# EAGLE board CAN_Ventil_Final1 (EAGLE 4.09)
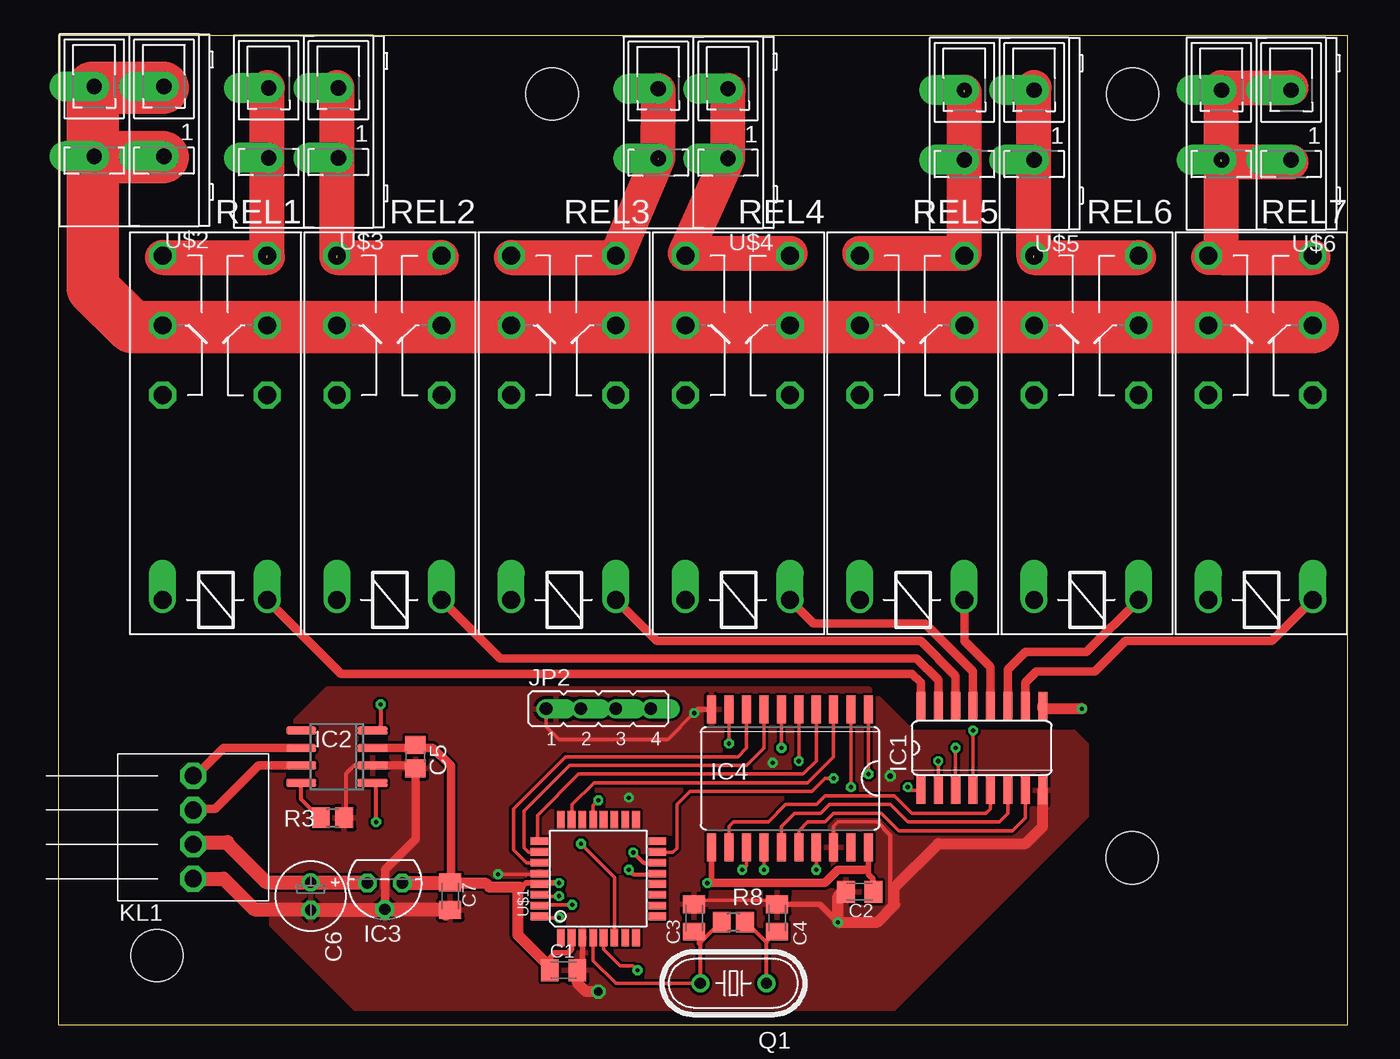
[diagram p0: board, top side]
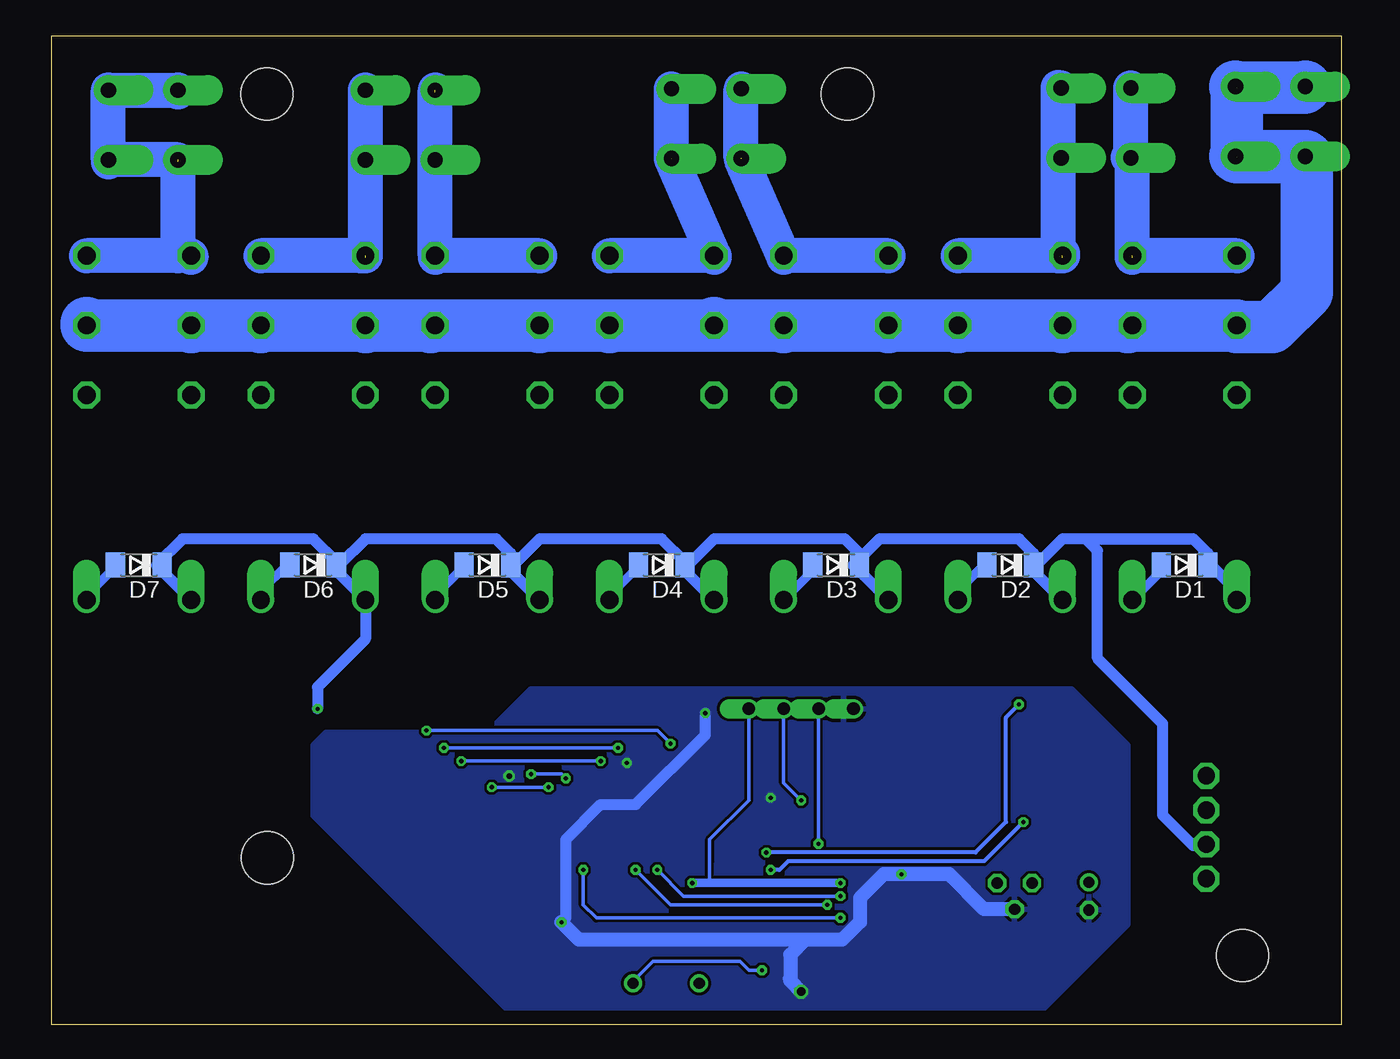
[diagram p1: board, bottom side, seen from below]

Size 93.96 x 72.06 mm. Coordinates in mm from the lower left corner, seen from the top.
Outline: 0,0 93.96,0 93.96,72.06 0,72.06 0,0
Copper layers used: Top, Bottom
Holes 3.81 mm at 78.25,12.15 78.3,67.82 35.99,67.82 7.2,5.02

## Footprints (pad centres in the part's own frame; a part is rotated, then mirrored left to right if it is on the bottom)
C0805K = smd 1.3 x 1.6: 1 -1,0; 2 1,0
C0805 = smd 1.3 x 1.5: 1 -0.85,0; 2 0.85,0
E2-5 = drill 0.813 pad 1.27 round: + -1.016,0 | drill 0.813 pad 1.27 octagon: - 1.016,0
SOD80C = smd 1.4 x 1.8: A 1.7,0; C -1.7,0
SO16 = smd 0.66 x 2.032: 1 -4.445,-3.073; 2 -3.175,-3.073; 3 -1.905,-3.073; 4 -0.635,-3.073; 5 0.635,-3.073; 6 1.905,-3.073; 7 3.175,-3.073; 8 4.445,-3.073; 9 4.445,3.073; 10 3.175,3.073; 11 1.905,3.073; 12 0.635,3.073; 13 -0.635,3.073; 14 -1.905,3.073; 15 -3.175,3.073; 16 -4.445,3.073
SO8 = smd 0.6 x 2.2: 1 -1.905,-2.6; 2 -0.635,-2.6; 3 0.635,-2.6; 4 1.905,-2.6; 5 1.905,2.6; 6 0.635,2.6; 7 -0.635,2.6; 8 -1.905,2.6
TO92 = drill 0.813 octagon: 1 -1.27,0; 2 0,1.905; 3 1.27,0
SO20W = smd 0.66 x 2.032: 1 -5.715,-5.029; 2 -4.445,-5.029; 3 -3.175,-5.029; 4 -1.905,-5.029; 5 -0.635,-5.029; 6 0.635,-5.029; 7 1.905,-5.029; 8 3.175,-5.029; 9 4.445,-5.029; 10 5.715,-5.029; 11 5.715,5.029; 12 4.445,5.029; 13 3.175,5.029; 14 1.905,5.029; 15 0.635,5.029; 16 -0.635,5.029; 17 -1.905,5.029; 18 -3.175,5.029; 19 -4.445,5.029; 20 -5.715,5.029
JP4 = drill 0.914 offset: 1 -3.81,0; 2 -1.27,0; 3 1.27,0; 4 3.81,0
AST021-04 = drill 1.27 octagon: P$1 0,0; P$2 0,2.5; P$3 0,5; P$4 0,7.5
HC49U-V = drill 0.813 round: 1 -2.413,0; 2 2.413,0
R0805 = smd 1.3 x 1.5: 1 -0.85,0; 2 0.85,0
FIN41 = drill 1.3 offset: 1 -10.16,3.81; 2 -10.16,-3.81 | drill 1.3 octagon: O1 4.763,-3.81; O2 4.763,3.81; P1 9.842,-3.81; P2 9.842,3.81; S1 14.922,-3.81; S2 14.922,3.81
LQFP32 = smd 1.27 x 0.559: 1 -4.293,2.743; 2 -4.293,1.956; 3 -4.293,1.168; 4 -4.293,0.381; 5 -4.293,-0.381; 6 -4.293,-1.168; 7 -4.293,-1.956; 8 -4.293,-2.743; 17 4.293,-2.743; 18 4.293,-1.956; 19 4.293,-1.168; 20 4.293,-0.381; 21 4.293,0.381; 22 4.293,1.168; 23 4.293,1.956; 24 4.293,2.743 | smd 0.559 x 1.27: 9 -2.743,-4.293; 10 -1.956,-4.293; 11 -1.168,-4.293; 12 -0.381,-4.293; 13 0.381,-4.293; 14 1.168,-4.293; 15 1.956,-4.293; 16 2.743,-4.293; 25 2.743,4.293; 26 1.956,4.293; 27 1.168,4.293; 28 0.381,4.293; 29 -0.381,4.293; 30 -1.168,4.293; 31 -1.956,4.293; 32 -2.743,4.293
W236-2 = drill 1.118 pad 2.184 offset: 1 0,0; 2 0,5.08; 3 5.08,0; 4 5.08,5.08

## Placement (x,y rotation side)
C1  100nF  [C0805K]  36.82,3.96 0 top
C2  100nF  [C0805K]  58.41,9.68 180 top
C3  10pF  [C0805K]  46.35,7.77 270 top
C4  10pF  [C0805K]  52.38,7.77 270 top
C5  100nF  [C0805]  26.03,19.52 270 top
C6  47µF  [E2-5]  18.41,9.36 270 top
C7  100nF  [C0805K]  28.57,9.36 270 top
D1  1N4148  [SOD80C]  11.42,33.49 180 bottom
D2  1N4148  [SOD80C]  24.12,33.49 180 bottom
D3  1N4148  [SOD80C]  36.82,33.49 180 bottom
D4  1N4148  [SOD80C]  49.52,33.49 180 bottom
D5  1N4148  [SOD80C]  62.22,33.49 180 bottom
D6  1N4148  [SOD80C]  74.93,33.49 180 bottom
D7  1N4148  [SOD80C]  87.62,33.49 180 bottom
IC1  ULN2003AD  [SO16]  67.31,20.16 0 top
IC2  PCA82C250T  [SO8]  20.32,19.52 90 top
IC3  7805L  [TO92]  23.81,10.31 180 top
IC4  74HCT373DW  [SO20W]  53.34,17.93 180 top
JP2  [JP4]  39.36,23.01 0 top
KL1  AST021-04  [AST021-04]  9.84,10.63 0 top
Q1  4.00000  [HC49U-V]  49.21,3.01 180 top
R3  2k7  [R0805]  20,15.07 0 top
R8  1M  [R0805]  49.21,7.46 180 top
REL1  FIN41.61  [FIN41]  11.42,41.11 90 top
REL2  FIN41.61  [FIN41]  24.12,41.11 90 top
REL3  FIN41.61  [FIN41]  36.82,41.11 90 top
REL4  FIN41.61  [FIN41]  49.52,41.11 90 top
REL5  FIN41.61  [FIN41]  62.22,41.11 90 top
REL6  FIN41.61  [FIN41]  74.93,41.11 90 top
REL7  FIN41.61  [FIN41]  87.62,41.11 90 top
U$1  MC9S08DZ16CLC  [LQFP32]  39.36,10.63 90 top
U$2  W236-2  [W236-2]  7.71,68.36 180 top
U$3  W236-2  [W236-2]  20.42,68.25 180 top
U$4  W236-2  [W236-2]  48.81,68.2 180 top
U$5  W236-2  [W236-2]  71.12,68.1 180 top
U$6  W236-2  [W236-2]  89.85,68.1 180 top

## Library data of the parts
C1-C7 R3 R8 = rcl
D1-D7 = diode
IC1 = uln-udn
IC2 = micro-philips
IC3 = linear
IC4 = 74xx-eu
JP2 = jumper
KL1 = con-ria
Q1 = crystal
REL1-REL7 = relay
U$1 = MC9S08DZ16CLC
U$2-U$6 = con-wago-508

## Nets
230V: REL1.P1 REL1.P2 REL2.P1 REL2.P2 REL3.P1 REL3.P2 REL4.P1 REL4.P2 REL5.P1 REL5.P2 REL6.P1 REL6.P2 REL7.P1 REL7.P2 U$2.1 U$2.2 U$2.3 U$2.4
+5V: C1.1 C2.1 C5.1 C7.1 IC2.3 IC3.1 IC4.11 IC4.20 JP2.4 U$1.2 U$1.29
+12V: C6.+ D1.C D2.C D3.C D4.C D5.C D6.C D7.C IC1.9 IC3.3 KL1.P$2 REL1.1 REL2.1 REL3.1 REL4.1 REL5.1 REL6.1 REL7.1
BKGD: JP2.3 U$1.21
CANH: IC2.7 KL1.P$3
CANL: IC2.6 KL1.P$4
CH1: REL1.S1 REL1.S2 U$3.3 U$3.4
CH2: REL2.S1 REL2.S2 U$3.1 U$3.2
CH3: REL3.S1 REL3.S2 U$4.3 U$4.4
CH4: REL4.S1 REL4.S2 U$4.1 U$4.2
CH5: REL5.S1 REL5.S2 U$5.3 U$5.4
CH6: REL6.S1 REL6.S2 U$5.1 U$5.2
CH7: REL7.S1 REL7.S2 U$6.1 U$6.2 U$6.3 U$6.4
GND: C1.2 C2.2 C3.1 C4.1 C5.2 C6.- C7.2 IC1.8 IC2.2 IC3.2 IC4.10 IC4.18 JP2.1 KL1.P$1 R3.2 U$1.3 U$1.28
N$1: IC2.1 U$1.13
N$2: IC2.4 U$1.14
N$3: IC2.8 R3.1
N$5: D3.A IC1.14 REL3.2
N$6: D1.A IC1.16 REL1.2
N$8: D2.A IC1.15 REL2.2
N$9: C4.2 Q1.1 R8.1 U$1.5
N$10: C3.2 Q1.2 R8.2 U$1.4
N$11: IC1.1 IC4.2
N$12: IC1.2 IC4.5
N$13: IC4.17 U$1.32
N$14: IC4.14 U$1.31
N$15: IC4.13 U$1.30
N$17: IC4.8 U$1.27
N$19: IC4.7 U$1.26
N$24: IC4.4 U$1.25
N$28: IC4.3 U$1.23
N$29: IC1.3 IC4.6
N$30: IC1.4 IC4.9
N$31: IC1.5 IC4.12
N$32: IC1.6 IC4.15
N$33: IC1.7 IC4.16
N$34: D4.A IC1.13 REL4.2
N$35: D5.A IC1.12 REL5.2
N$36: D6.A IC1.11 REL6.2
N$37: D7.A IC1.10 REL7.2
OE: IC4.1 U$1.15
RESET: JP2.2 U$1.6

## Tracks (layer width: path | path; a pad name or v marks a point on that pad's centre or on a via)
230V  (2 unrouted)
  Top 3.81: 7.62,68.28 2.54,68.28 2.54,53.68 5.39,50.82 91.44,50.82 | 2.54,63.2 7.62,63.2
  Bottom 3.81: U$2.2 7.62,63.37 7.62,68.26 U$2.1 7.63,68.28 2.71,68.28 U$2.3 | U$2.2 7.63,63.2 7.62,63.2 | 7.62,63.2 2.54,63.2 2.54,53.36 5.08,50.82 7.62,50.82 REL1.P2 REL1.P1 | 7.62,63.2 7.69,63.28 U$2.2 | U$2.4 7.54,63.28 7.62,63.2 | REL1.P1 15.42,50.95 15.55,50.82 | REL1.P1 20.18,50.95 20.32,50.82 REL2.P2 27.8,50.95 27.94,50.82 REL2.P1 32.88,50.95 33.02,50.82 REL3.P2 40.5,50.95 40.63,50.82 REL3.P1 45.53,50.95 45.71,51.14 REL4.P2 53.2,50.95 53.34,50.82 REL4.P1 58.28,50.95 58.41,50.82 REL5.P2 REL5.P1 | REL5.P1 66.22,50.95 66.35,50.82 | REL5.P1 70.98,50.95 71.12,50.82 REL6.P2 78.6,50.95 78.73,50.82 REL6.P1 83.68,50.95 83.81,50.82 REL7.P2 91.25,50.95 91.44,51.14 REL7.P1
+5V  (via drill 0.3)
  Top 0.254: 34.92,10.31 34.98,10.25 U$1.29 | 59.05,11.58 IC4.20
  Top 0.305: 26.03,20.16 25.39,20.16 | C5.1 26.03,20.47 25.71,20.47
  Top 0.406: IC4.11 47.62,10.63 v47.3,10.31 | v36.51,10.31 34.92,10.31 34.1,10.31 33.65,9.86 33.65,10.02 | IC4.20 59.05,10.95 59.37,10.63 59.37,9.68 C2.1 | 58.73,11.27 59.05,11.58 | U$1.2 37.41,5.5 37.14,5.23 36.19,5.23 35.87,4.92 35.87,3.96 C1.1
  Top 0.61: 58.73,11.27 56.83,11.27 55.88,10.31 v47.3,10.31 | C7.1 28.62,10.36 28.62,18.84 27.3,20.16 26.03,20.16 | C5.1 25.82,20.37 25.71,20.47 25.39,20.16 IC2.3
  Top 0.813: 28.57,10.31 31.14,10.31 31.43,10.02 33.65,10.02 33.49,9.86 33.49,6.53 35.87,4.15 35.87,3.96
  Top 1.016: C7.1 28.57,10.31 IC3.1
  Bottom 0.254: JP2.4 43.17,16.35 46.03,13.49 | 46.03,13.49 46.03,11.9 | 46.03,10.31 46.03,13.49
  Bottom 0.61: v36.51,10.31 46.03,10.31 v47.3,10.31
+12V  (via drill 0.3)
  Top 0.813: IC1.9 71.75,23.01 v74.61,23.01
  Top 1.016: IC3.3 22.47,10.38 C6.+ 15.17,10.38 12.33,13.21 12.33,13.28 9.99,13.28 KL1.P$2
  Bottom 0.813: REL1.1 7.62,31.59 9.52,33.49 D1.C 9.72,34.33 10.79,35.4 | D2.C 22.22,33.49 20.32,35.4 10.79,35.4 | D2.C 22.43,34.33 23.49,35.4 33.65,35.4 35.55,33.49 D3.C | D3.C 35.12,34.33 36.19,35.4 45.71,35.4 47.62,33.49 D4.C | D4.C 47.82,33.7 49.52,35.4 58.41,35.4 60.32,33.49 D5.C | D5.C 60.52,34.33 61.59,35.4 71.12,35.4 73.02,33.49 D6.C | D6.C 73.23,33.7 74.93,35.4 84.45,35.4 86.36,33.49 D7.C 85.93,33.06 REL7.1 | D6.C 73.23,33.06 REL6.1 71.12,30.5 | D5.C 60.52,33.06 REL5.1 | D4.C 47.82,33.06 REL4.1 | D3.C 35.12,33.06 REL3.1 | D2.C 22.43,33.06 REL2.1 | v74.61,23.01 74.61,24.6 71.12,28.09 71.12,30.5 | 9.84,13.2 KL1.P$2 9.84,13.04 10.79,13.04 13.01,15.26 13.01,21.93 17.78,26.69 17.78,34.54 18.61,35.38 10.81,35.38 10.79,35.4 | 71.12,30.5 71.12,30.82
BKGD  (via drill 0.3)
  Top 0.254: U$1.21 38.98,15.96 v39.36,16.35
  Bottom 0.254: v39.36,16.35 40.63,17.62 JP2.3
CANH
  Top 0.305: KL1.P$3 9.84,15.71
  Top 0.61: IC2.7 14.6,18.89 11.42,15.71 9.84,15.71
CANL
  Top 0.305: KL1.P$4 10.03,18.13
  Top 0.61: IC2.6 12.06,20.16 10.03,18.13
CH1  (1 unrouted)
  Top 2.54: 7.62,55.9 15.23,55.9 15.23,68.28
  Bottom 2.54: REL1.S2 15.1,56.03 15.23,55.9 REL1.S1 15.23,63.2 15.27,63.17 U$3.4 15.52,63.17 15.55,63.2 15.34,63.41 U$3.3
CH2  (1 unrouted)
  Top 2.54: 27.94,55.9 20.32,55.9 20.32,68.28
  Bottom 2.54: REL2.S2 REL2.S1 | REL2.S2 20.32,56.22 | 20.63,63.17 20.63,63.2 | REL2.S2 20.63,56.03 20.63,63.17 | 20.63,68.25 20.63,68.28 | 20.63,68.25 U$3.1 | 20.63,63.17 U$3.2 | 20.63,63.17 20.63,68.25
CH3  (1 unrouted)
  Top 2.54: 33.02,55.9 40.63,55.9 43.7,63.12 43.73,68.06
  Bottom 2.54: REL3.S2 REL3.S1 | REL3.S1 40.63,55.9 | U$4.4 43.73,63.3 | REL3.S1 U$4.4 | U$4.4 U$4.3
CH4  (1 unrouted)
  Top 2.54: 53.34,56.22 45.71,56.22 48.79,63.12 48.81,68.06
  Bottom 2.54: REL4.S2 REL4.S1 | REL4.S2 45.71,55.9 | REL4.S2 U$4.2 U$4.1
CH5  (1 unrouted)
  Top 2.54: 58.41,56.22 66.04,56.22 66.04,67.96
  Bottom 2.54: REL5.S2 REL5.S1 | REL5.S1 66.04,55.9 | REL5.S1 U$5.4 U$5.3
CH6  (1 unrouted)
  Top 2.54: 78.73,55.9 71.12,55.9 71.12,68.28
  Bottom 2.54: 71.43,56.03 REL6.S2 U$5.2 U$5.1 | 71.43,56.03 REL6.S1 | 71.43,56.03 71.43,56.22
CH7  (1 unrouted)
  Top 2.54: 84.77,55.9 91.44,55.9 | 84.77,55.9 83.81,55.9 | 84.77,55.9 84.77,62.88 | 84.77,62.88 84.77,68.28 89.85,68.28 | 84.77,62.88 89.85,62.88
  Bottom 2.54: REL7.S2 REL7.S1 | REL7.S2 83.81,55.9 | REL7.S2 84.77,56.03 U$6.4 U$6.2 | U$6.2 89.85,62.88 | U$6.2 U$6.1 U$6.3 84.77,67.96
GND  (via drill 0.3, 0.41, 0.61)
  Top 0.254: 59.68,14.76 56.83,14.76 56.51,14.44 IC4.18 56.51,12.85 | JP2.1 35.55,21.74 36.51,20.79 44.45,20.79 v46.35,22.7 | U$1.28 35.07,10.95 v32.06,10.95 | C4.1 52.38,9.04 46.62,9.04 C3.1
  Top 0.305: IC2.2 21.59,18.89 20.95,18.25 20.95,15.08 R3.2 | 59.68,14.76 60.64,13.81 60.64,8.41 59.68,7.46
  Top 0.406: IC4.10 46.62,22.96 v46.35,22.7 | C1.2 37.78,3.96 38.2,4.38 U$1.3 | C4.1 55.51,8.77 v56.83,7.46
  Top 0.61: 37.82,3.06 C1.2 | C7.2 28.57,8.41 | IC3.2 23.81,11.27 26.03,13.49 26.03,18.57 | 26.03,18.57 C5.2 | IC2.2 25.71,18.89 26.03,18.57
  Top 0.813: 57.46,9.68 C2.2 57.14,9.68 56.83,9.36 v56.83,7.46 59.68,7.46 60.95,8.73 60.95,10 64.13,13.17 70.48,13.17 71.75,14.44 IC1.8 | 37.82,3.06 38.48,2.4 v39.36,2.4
  Top 1.016: KL1.P$1 12.06,10.63 14.28,8.41 18.41,8.41 C6.- 23.74,8.34 IC3.2 27.94,8.41 28.25,8.09 28.52,8.36 C7.2
  Bottom 0.813: v46.35,22.7 46.35,21.11 51.43,16.03 53.97,16.03 56.51,13.49 56.51,7.77 v56.83,7.46 | v39.36,2.4 40.32,3.35
  Bottom 1.016: v56.83,7.46 55.56,6.19 36.37,6.19 | IC3.2 26.03,8.41 28.57,10.95 v32.06,10.95 33.31,10.95 33.33,10.97 35.08,9.23 35.08,7.48 36.37,6.19 | 36.37,6.19 39.07,6.19 40.16,5.1 40.16,3.19 v39.36,2.4
  other vias: 52.06,19.07 60.64,18.12 41.59,16.53
  pour Bottom: 59.05,24.47 62.22,21.29 73.97,21.29 74.93,20.34 74.93,15.26 59.68,0.02 22.86,0.02 15.55,7.32 15.55,20.34 19.68,24.47
  pour Top: 59.05,24.47 62.22,21.29 73.97,21.29 74.93,20.34 74.93,15.26 59.68,0.02 22.86,0.02 15.55,7.32 15.55,20.34 19.68,24.47
N$1  (via drill 0.3)
  Top 0.305: IC2.1 23.17,17.36 v23.17,14.76 | 43.72,10.95 43.81,10.95 | 43.72,10.95 U$1.13 | v41.59,11.27 41.9,10.95 43.72,10.95
  Bottom 0.305: v41.59,11.27 40.95,11.27 40.32,11.9 26.03,11.9 v23.17,14.76
N$2  (via drill 0.3)
  Top 0.305: U$1.14 42.64,11.8 v41.9,12.54 | IC2.4 23.17,21.43 23.49,21.74 v23.49,23.33
  Bottom 0.305: v23.49,23.33 24.44,22.38 24.44,14.76 26.67,12.54 v41.9,12.54
N$3
  Top 0.305: R3.1 19.05,15.08 17.71,16.41 IC2.8
N$5
  Top 0.61: REL3.2 43.63,27.96 62.86,27.96 65.4,25.42 IC1.14 65.4,23.2
  Bottom 0.61: D3.A 38.09,33.49 REL3.2
N$6
  Top 0.61: IC1.16 62.86,24.92 62.22,25.55 20.63,25.55 REL1.2
  Bottom 0.61: D1.A 13.12,33.29 13.01,33.17 REL1.2
N$8
  Top 0.61: REL2.2 32.2,26.69 62.54,26.69 64.13,25.1 IC1.15
  Bottom 0.61: D2.A 26.03,33.49 27.94,31.59 REL2.2
N$9  (via drill 0.3)
  Top 0.254: 52.38,6.82 C4.2 52.38,6.76 51.62,5.99 | U$1.5 39.75,5.49 40.95,4.28 41.9,4.28 v42.22,3.96
  Top 0.305: 51.75,3.01 Q1.1 51.62,5.99 50.16,7.46 R8.1
  Bottom 0.254: Q1.1 51.75,3.01 50.16,4.6 43.81,4.6 43.17,3.96 v42.22,3.96
N$10
  Top 0.254: 46.79,5.99 46.67,5.87 46.67,6.46 C3.2 | U$1.4 38.98,4.66 40.63,3.01 Q1.2
  Top 0.305: R8.2 48.25,7.46 46.79,5.99 Q1.2
N$11  (via drill 0.3)
  Top 0.254: IC1.1 62.12,17.08 v61.91,17.3 | 57.78,23.01 IC4.2 v57.78,17.3
  Bottom 0.254: v57.78,17.3 v61.91,17.3
N$12  (via drill 0.3)
  Top 0.254: v64.13,19.2 IC1.2 | 53.97,23.01 IC4.5 v53.97,19.2
  Bottom 0.254: v53.97,19.2 v64.13,19.2
N$13  (via drill 0.3)
  Top 0.254: v55.24,11.27 IC4.17 | U$1.32 35.12,7.89 35.24,7.77 v36.51,7.77
  Bottom 0.254: v55.24,11.27 55.24,8.73 54.29,7.77 v36.51,7.77
N$14  (via drill 0.3)
  Top 0.254: v51.43,11.27 IC4.14 | U$1.31 35.12,8.73 v37.46,8.73
  Bottom 0.254: v51.43,11.27 48.89,8.73 v37.46,8.73
N$15  (via drill 0.3)
  Top 0.254: IC4.13 50.16,11.58 v49.84,11.27 | U$1.30 35.17,9.36 v36.51,9.36
  Bottom 0.254: v49.84,11.27 47.94,9.36 v36.51,9.36
N$17
  Top 0.254: IC4.8 50.16,20.16 49.52,19.52 36.96,19.52 33.17,15.74 33.17,12.72 34.13,11.77 34.76,11.77 34.89,11.9 34.92,11.9 35.02,11.8 U$1.27
N$19
  Top 0.254: IC4.7 51.43,20.16 50.16,18.89 37.28,18.89 33.97,15.58 33.97,12.88 34.28,12.56 35.08,12.56 35.05,12.54 34.92,12.54 34.97,12.59 U$1.26
N$24
  Top 0.254: IC4.4 55.24,19.2 54.29,18.25 37.91,18.25 34.92,15.26 34.92,13.67 34.62,13.37 | 34.62,13.37 34.6,13.35 | U$1.25 34.62,13.37
N$28
  Top 0.254: IC4.3 56.51,19.52 54.6,17.62 39.05,17.62 37.46,16.03 37.46,14.76 37.41,14.81 U$1.23
N$29  (via drill 0.3)
  Top 0.254: v65.4,20.16 IC1.3 | 52.7,23.01 IC4.6 v52.7,20.16
  Bottom 0.254: v52.7,20.16 v65.4,20.16
N$30  (via drill 0.3)
  Top 0.254: 66.67,16.98 IC1.4 v66.67,21.43 | 48.89,23.01 IC4.9 v48.89,20.47
  Bottom 0.254: v66.67,21.43 49.84,21.43 v48.89,20.47
N$31
  Top 0.254: IC1.5 67.94,15.71 67.62,15.39 62.22,15.39 60.95,16.66 55.88,16.66 55.24,16.03 53.02,16.03 51.75,14.76 49.21,14.76 48.89,14.44 IC4.12 48.89,12.85
N$32
  Top 0.254: IC1.6 69.21,15.39 68.58,14.76 61.91,14.76 60.64,16.03 56.19,16.03 55.56,15.39 53.65,15.39 52.7,14.44 IC4.15 52.7,12.85
N$33
  Top 0.254: IC1.7 70.48,15.08 69.53,14.12 61.27,14.12 60,15.39 56.51,15.39 55.88,14.76 54.6,14.76 53.97,14.12 IC4.16 53.97,12.85
N$34
  Top 0.61: REL4.2 55.06,29.23 63.18,29.23 66.67,25.74 IC1.13 66.67,23.2
  Bottom 0.61: D4.A 51.11,33.49 53.34,31.27 REL4.2
N$35
  Top 0.61: REL5.2 66.04,27.96 67.94,26.05 IC1.12
  Bottom 0.61: D5.A 63.92,33.38 66.04,31.27 REL5.2
N$36
  Top 0.61: IC1.11 69.21,25.87 70.48,27.14 74.93,27.14 REL6.2
  Bottom 0.61: D6.A 76.83,33.49 78.73,31.59 REL6.2
N$37
  Top 0.61: IC1.10 70.48,24.92 71.3,25.74 75.56,25.74 77.78,27.96 88.44,27.96 REL7.2
  Bottom 0.61: D7.A 89.21,33.49 91.44,31.27 REL7.2
OE  (via drill 0.3)
  Top 0.254: v59.05,18.25 IC4.1 | v56.51,17.93 55.88,17.93 54.92,16.98 46.03,16.98 45.08,16.03 45.08,12.85 44.76,12.54 43.81,12.54 43.76,12.59 U$1.15
  Bottom 0.254: v59.05,18.25 56.83,18.25 v56.51,17.93
RESET  (via drill 0.3)
  Top 0.254: U$1.6 40.53,10.73 v38.09,13.17
  Bottom 0.254: v38.09,13.17 JP2.2